# EAGLE board tigerV3s (EAGLE 9.6.2)
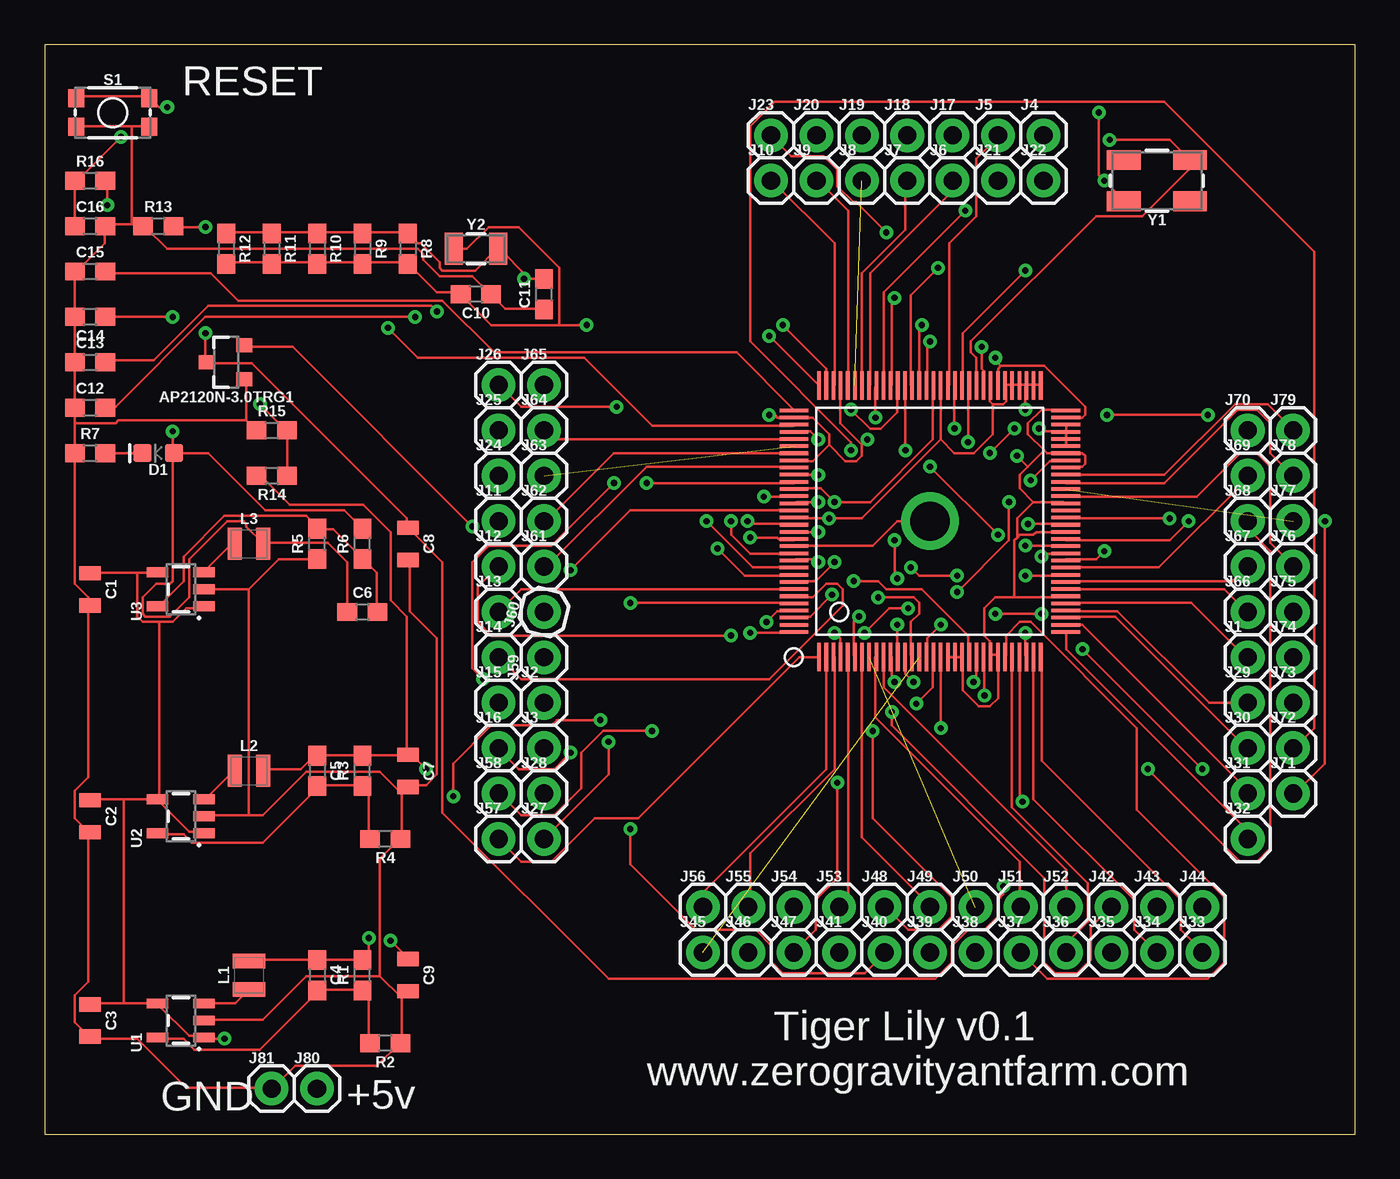
[diagram p0: board, top side]
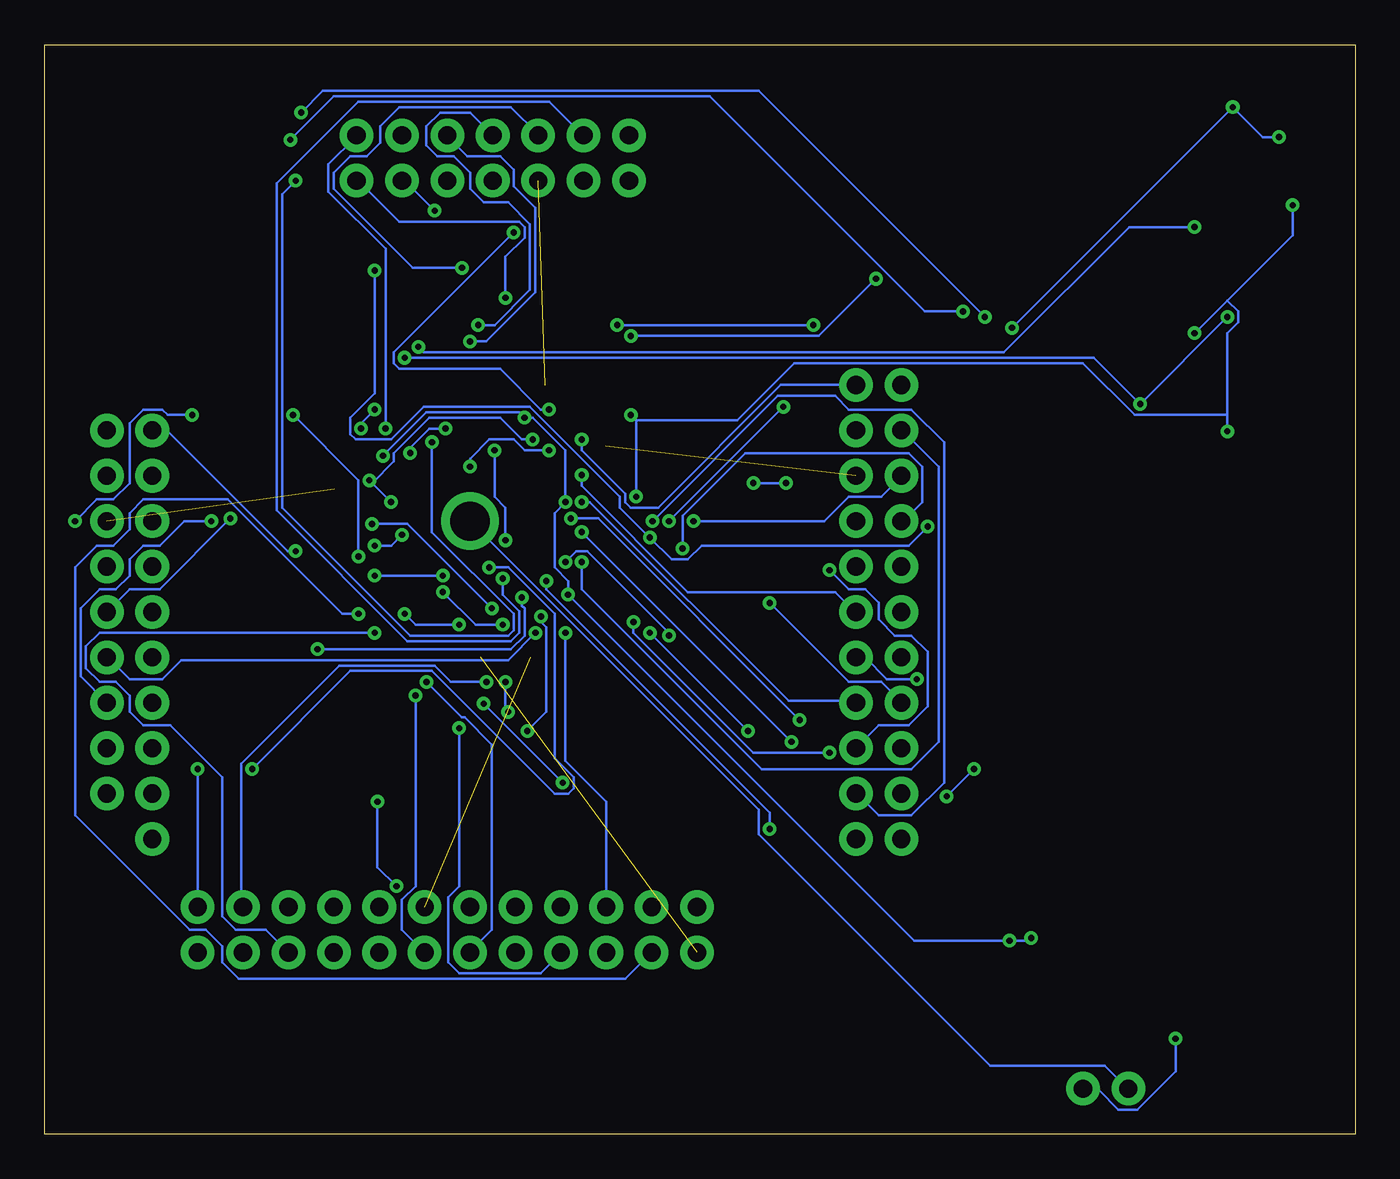
[diagram p1: board, bottom side, seen from below]

Size 73.33 x 60.95 mm. Coordinates in mm from the lower left corner, seen from the top.
Outline: 0,0 73.33,0 73.33,60.95 0,60.95 0,0
Copper layers (1*16): Top 0.035mm / dielectric 1.5mm / Bottom 0.035mm
Design rules "default": minimum track width 6mil, minimum drill 0.35mm, track to track 6mil, track to pad 6mil, pad to pad 6mil, via to via 6mil, smd to smd 6mil, copper to edge 40mil, drill to drill 6mil, minimum pad ring 10mil, minimum via ring 8mil, stop-mask expansion 4mil, vias tented up to drill 0mil, thermal gap 10mil

## Footprints (pad centres in the part's own frame; a part is rotated, then mirrored left to right if it is on the bottom)
SOT23-3 = smd 0.8 x 0.9: 1 -0.95,-1; 2 0.95,-1; 3 0,1.1
0805 = smd 0.8 x 1.2: 1 -0.9,0; 2 0.9,0
0603 = smd 1.1 x 1: 1 -0.85,0; 2 0.85,0
LED-0603 = smd 1 x 1: A -0.877,0; C 0.877,0
1X01 = drill 1.016 pad 1.88: 1 0,0
0805-WIDE = smd 0.8 x 1.8: 1 -0.8,0; 2 0.8,0
TACTILE_SWITCH_SMD_4.6X2.8MM = smd 0.9 x 1: 1 -2.05,-0.8; 2 2.05,-0.8; 3 2.05,0.8; 4 -2.05,0.8
SOT23-5 = smd 0.55 x 1.2: 1 -0.95,-1.3; 2 0,-1.3; 3 0.95,-1.3; 4 0.95,1.3; 5 -0.95,1.3
QFP-128 = smd 0.2 x 1.6: 1 -6.2,-7.6; 2 -5.8,-7.6; 3 -5.4,-7.6; 4 -5,-7.6; 5 -4.6,-7.6; 6 -4.2,-7.6; 7 -3.8,-7.6; 8 -3.4,-7.6; 9 -3,-7.6; 10 -2.6,-7.6; 11 -2.2,-7.6; 12 -1.8,-7.6; 13 -1.4,-7.6; 14 -1,-7.6; 15 -0.6,-7.6; 16 -0.2,-7.6; 17 0.2,-7.6; 18 0.6,-7.6; 19 1,-7.6; 20 1.4,-7.6; 21 1.8,-7.6; 22 2.2,-7.6; 23 2.6,-7.6; 24 3,-7.6; 25 3.4,-7.6; 26 3.8,-7.6; 27 4.2,-7.6; 28 4.6,-7.6; 29 5,-7.6; 30 5.4,-7.6; 31 5.8,-7.6; 32 6.2,-7.6; 65 6.2,7.6; 66 5.8,7.6; 67 5.4,7.6; 68 5,7.6; 69 4.6,7.6; 70 4.2,7.6; 71 3.8,7.6; 72 3.4,7.6; 73 3,7.6; 74 2.6,7.6; 75 2.2,7.6; 76 1.8,7.6; 77 1.4,7.6; 78 1,7.6; 79 0.6,7.6; 80 0.2,7.6; 81 -0.2,7.6; 82 -0.6,7.6; 83 -1,7.6; 84 -1.4,7.6; 85 -1.8,7.6; 86 -2.2,7.6; 87 -2.6,7.6; 88 -3,7.6; 89 -3.4,7.6; 90 -3.8,7.6; 91 -4.2,7.6; 92 -4.6,7.6; 93 -5,7.6; 94 -5.4,7.6; 95 -5.8,7.6; 96 -6.2,7.6 | smd 1.6 x 0.2: 33 7.6,-6.2; 34 7.6,-5.8; 35 7.6,-5.4; 36 7.6,-5; 37 7.6,-4.6; 38 7.6,-4.2; 39 7.6,-3.8; 40 7.6,-3.4; 41 7.6,-3; 42 7.6,-2.6; 43 7.6,-2.2; 44 7.6,-1.8; 45 7.6,-1.4; 46 7.6,-1; 47 7.6,-0.6; 48 7.6,-0.2; 49 7.6,0.2; 50 7.6,0.6; 51 7.6,1; 52 7.6,1.4; 53 7.6,1.8; 54 7.6,2.2; 55 7.6,2.6; 56 7.6,3; 57 7.6,3.4; 58 7.6,3.8; 59 7.6,4.2; 60 7.6,4.6; 61 7.6,5; 62 7.6,5.4; 63 7.6,5.8; 64 7.6,6.2; 97 -7.6,6.2; 98 -7.6,5.8; 99 -7.6,5.4; 100 -7.6,5; 101 -7.6,4.6; 102 -7.6,4.2; 103 -7.6,3.8; 104 -7.6,3.4; 105 -7.6,3; 106 -7.6,2.6; 107 -7.6,2.2; 108 -7.6,1.8; 109 -7.6,1.4; 110 -7.6,1; 111 -7.6,0.6; 112 -7.6,0.2; 113 -7.6,-0.2; 114 -7.6,-0.6; 115 -7.6,-1; 116 -7.6,-1.4; 117 -7.6,-1.8; 118 -7.6,-2.2; 119 -7.6,-2.6; 120 -7.6,-3; 121 -7.6,-3.4; 122 -7.6,-3.8; 123 -7.6,-4.2; 124 -7.6,-4.6; 125 -7.6,-5; 126 -7.6,-5.4; 127 -7.6,-5.8; 128 -7.6,-6.2 | drill 2.2: P$2 0,0
CRYSTAL-SMD-5X3.2-4PAD = smd 1.9 x 1.1: 1 -1.85,-1.15; 2 1.85,-1.15; 3 1.85,1.15; 4 -1.85,1.15
CRYSTAL-SMD-3.2X1.5MM = smd 1 x 1.8: P$1 -1.25,0; P$2 1.25,0

## Placement (x,y rotation side)
AP2120N-3.0TRG1  20V/4.2A/52mΩ/1.4W  [SOT23-3]  10.16,43.18 90 top
C1  22uF  [0805]  2.54,30.48 270 top
C2  22uF  [0805]  2.54,17.78 270 top
C3  22uF  [0805]  2.54,6.35 270 top
C4  22pF  [0603]  15.24,8.89 270 top
C5  22pF  [0603]  15.24,20.32 270 top
C6  22pF  [0603]  17.78,29.21 0 top
C7  22uF  [0805]  20.32,20.32 270 top
C8  22uF  [0805]  20.32,33.02 270 top
C9  22uF  [0805]  20.32,8.89 270 top
C10  18pF  [0603]  24.13,46.99 180 top
C11  18pF  [0603]  27.94,46.99 90 top
C12  18pF  [0603]  2.54,40.64 0 top
C13  18pF  [0603]  2.54,43.18 0 top
C14  1nF  [0603]  2.54,45.72 180 top
C15  4.7uF  [0603]  2.54,48.26 0 top
C16  1.0uF  [0603]  2.54,50.8 0 top
D1  BLUE  [LED-0603]  6.35,38.1 180 top
J1  [1X01]  67.31,26.67 0 top
J2  [1X01]  27.94,24.13 0 top
J3  [1X01]  27.94,21.59 0 top
J4  [1X01]  55.88,55.88 0 top
J5  [1X01]  53.34,55.88 0 top
J6  [1X01]  50.8,53.34 0 top
J7  [1X01]  48.26,53.34 0 top
J8  [1X01]  45.72,53.34 0 top
J9  [1X01]  43.18,53.34 0 top
J10  [1X01]  40.64,53.34 0 top
J11  [1X01]  25.4,34.29 0 top
J12  [1X01]  25.4,31.75 0 top
J13  [1X01]  25.4,29.21 0 top
J14  [1X01]  25.4,26.67 0 top
J15  [1X01]  25.4,24.13 0 top
J16  [1X01]  25.4,21.59 0 top
J17  [1X01]  50.8,55.88 0 top
J18  [1X01]  48.26,55.88 0 top
J19  [1X01]  45.72,55.88 0 top
J20  [1X01]  43.18,55.88 0 top
J21  [1X01]  53.34,53.34 0 top
J22  [1X01]  55.88,53.34 0 top
J23  [1X01]  40.64,55.88 0 top
J24  [1X01]  25.4,36.83 0 top
J25  [1X01]  25.4,39.37 0 top
J26  [1X01]  25.4,41.91 0 top
J27  [1X01]  27.94,16.51 0 top
J28  [1X01]  27.94,19.05 0 top
J29  [1X01]  67.31,24.13 0 top
J30  [1X01]  67.31,21.59 0 top
J31  [1X01]  67.31,19.05 0 top
J32  [1X01]  67.31,16.51 0 top
J33  [1X01]  64.77,10.16 0 top
J34  [1X01]  62.23,10.16 0 top
J35  [1X01]  59.69,10.16 0 top
J36  [1X01]  57.15,10.16 0 top
J37  [1X01]  54.61,10.16 0 top
J38  [1X01]  52.07,10.16 0 top
J39  [1X01]  49.53,10.16 0 top
J40  [1X01]  46.99,10.16 0 top
J41  [1X01]  44.45,10.16 0 top
J42  [1X01]  59.69,12.7 0 top
J43  [1X01]  62.23,12.7 0 top
J44  [1X01]  64.77,12.7 0 top
J45  [1X01]  36.83,10.16 0 top
J46  [1X01]  39.37,10.16 0 top
J47  [1X01]  41.91,10.16 0 top
J48  [1X01]  46.99,12.7 0 top
J49  [1X01]  49.53,12.7 0 top
J50  [1X01]  52.07,12.7 0 top
J51  [1X01]  54.61,12.7 0 top
J52  [1X01]  57.15,12.7 0 top
J53  [1X01]  44.45,12.7 0 top
J54  [1X01]  41.91,12.7 0 top
J55  [1X01]  39.37,12.7 0 top
J56  [1X01]  36.83,12.7 0 top
J57  [1X01]  25.4,16.51 0 top
J58  [1X01]  25.4,19.05 0 top
J59  [1X01]  27.94,26.67 90 top
J60  [1X01]  27.94,29.21 75.9 top
J61  [1X01]  27.94,31.75 0 top
J62  [1X01]  27.94,34.29 0 top
J63  [1X01]  27.94,36.83 0 top
J64  [1X01]  27.94,39.37 0 top
J65  [1X01]  27.94,41.91 0 top
J66  [1X01]  67.31,29.21 0 top
J67  [1X01]  67.31,31.75 0 top
J68  [1X01]  67.31,34.29 0 top
J69  [1X01]  67.31,36.83 0 top
J70  [1X01]  67.31,39.37 0 top
J71  [1X01]  69.85,19.05 0 top
J72  [1X01]  69.85,21.59 0 top
J73  [1X01]  69.85,24.13 0 top
J74  [1X01]  69.85,26.67 0 top
J75  [1X01]  69.85,29.21 0 top
J76  [1X01]  69.85,31.75 0 top
J77  [1X01]  69.85,34.29 0 top
J78  [1X01]  69.85,36.83 0 top
J79  [1X01]  69.85,39.37 0 top
J80  [1X01]  15.24,2.54 0 top
J81  [1X01]  12.7,2.54 0 top
L1  2.2μH  [0805-WIDE]  11.43,8.89 90 top
L2  2.2μH  [0805-WIDE]  11.43,20.32 0 top
L3  2.2μH  [0805-WIDE]  11.43,33.02 0 top
R1  300k  [0603]  17.78,8.89 90 top
R2  300k  [0603]  19.05,5.08 180 top
R3  300k  [0603]  17.78,20.32 90 top
R4  150k  [0603]  19.05,16.51 180 top
R5  180  [0603]  15.24,33.02 90 top
R6  820k  [0603]  17.78,33.02 90 top
R7  10  [0603]  2.54,38.1 0 top
R8  2.0M  [0603]  20.32,49.53 270 top
R9  2.0M  [0603]  17.78,49.53 270 top
R10  2.0M  [0603]  15.24,49.53 270 top
R11  2.0M  [0603]  12.7,49.53 270 top
R12  2.0M  [0603]  10.16,49.53 270 top
R13  240  [0603]  6.35,50.8 0 top
R14  2.0k  [0603]  12.7,36.83 180 top
R15  2.0k  [0603]  12.7,39.37 0 top
R16  47k  [0603]  2.54,53.34 0 top
S1  MOMENTARY-SWITCH-SPST-SMD-4.6X2.8MM  [TACTILE_SWITCH_SMD_4.6X2.8MM]  3.81,57.15 0 top
U1  [SOT23-5]  7.62,6.35 90 top
U2  [SOT23-5]  7.62,17.78 90 top
U3  [SOT23-5]  7.62,30.48 90 top
U$1  V3S  [QFP-128]  49.53,34.29 0 top
Y1  24MHz  [CRYSTAL-SMD-5X3.2-4PAD]  62.23,53.34 180 top
Y2  32.768kHz  [CRYSTAL-SMD-3.2X1.5MM]  24.13,49.53 0 top

## Library data of the parts
AP2120N-3.0TRG1 = SparkFun-DiscreteSemi; PROD_ID: TRAN-14388
C1-C3 C7-C9 = SparkFun-Capacitors; PROD_ID: CAP-08402
C4-C6 = SparkFun-Capacitors; PROD_ID: CAP-07876
C10-C13 = SparkFun-Capacitors; PROD_ID: CAP-08267
C14 = SparkFun-Capacitors; PROD_ID: CAP-07886
C15 = SparkFun-Capacitors; PROD_ID: CAP-08280
C16 = SparkFun-Capacitors; PROD_ID: CAP-00868
D1 = SparkFun-LED; PROD_ID: DIO-08575
J1-J81 = SparkFun-Connectors
L1-L3 = SparkFun-Coils; PROD_ID: NDUC-14234
R1-R3 = SparkFun-Resistors; PROD_ID: RES-10809
R4 = SparkFun-Resistors; PROD_ID: RES-09117
R5 = SparkFun-Resistors; PROD_ID: RES-08788
R6 = SparkFun-Resistors; PROD_ID: RES-13247
R7 = SparkFun-Resistors; PROD_ID: RES-12581
R8-R12 = SparkFun-Resistors; PROD_ID: RES-10054
R13 = SparkFun-Resistors; PROD_ID: RES-07849
R14 R15 = SparkFun-Resistors; PROD_ID: RES-08296
R16 = SparkFun-Resistors; PROD_ID: RES-07871
S1 = SparkFun-Switches; PROD_ID: SWCH-13065
U1-U3 = SparkFun-IC-Power; PROD_ID: IC-14465
U$1 = allwinnerV3s
Y1 = SparkFun-Clocks; PROD_ID: XTAL-08298; SF_ID: COM-08581
Y2 = SparkFun-Clocks; PROD_ID: XTAL-13062

## Nets
+1.2V: C4.1 C9.1 L1.2 R1.2 U$1.19 U$1.20 U$1.21 U$1.25 U$1.26 U$1.38 U$1.47 U$1.51 U$1.56 U$1.58 U$1.64 U$1.80 U$1.88 U$1.108 U$1.126
+1.8V: C5.1 C7.1 L2.2 R3.2 R14.2 U$1.59 U$1.60 U$1.61 U$1.62 U$1.65 U$1.66 U$1.67 U$1.68 U$1.69 U$1.70 U$1.72 U$1.79 U$1.112
+3.0V: AP2120N-3.0TRG1.2 U$1.76 U$1.115
+3.3V: AP2120N-3.0TRG1.3 C6.1 C8.1 D1.A L3.2 R6.2 R16.2 U$1.12 U$1.29 U$1.57 U$1.93 U$1.98 U$1.104 U$1.109
+5V: C1.1 C2.1 C3.1 J80.1 U1.1 U1.4 U2.1 U2.4 U3.1 U3.4
GND: AP2120N-3.0TRG1.1 C1.2 C2.2 C3.2 C7.2 C8.2 C9.2 C10.1 C11.1 C12.1 C13.1 C14.2 C15.1 C16.2 J81.1 R2.1 R4.1 R5.1 R7.1 R13.1 R15.1 S1.1 S1.2 U1.2 U2.2 U3.2 U$1.116 U$1.P$2
N$1: L1.1 U1.3
N$2: D1.C R7.2
N$3: L2.1 U2.3
N$4: C13.2 U$1.74 Y1.1
N$5: L3.1 U3.3
N$6: C12.2 U$1.75 Y1.3
N$7: C6.2 R5.2 R6.1 U3.5
N$8: C5.2 R3.1 R4.2 U2.5
N$9: C4.2 R1.1 R2.2 U1.5
N$10: C10.2 R8.2 R9.2 R10.2 R11.2 R12.2 U$1.95 Y2.P$1
N$11: C11.2 R8.1 R9.1 R10.1 R11.1 R12.1 U$1.96 Y2.P$2
RESET: C16.1 R16.1 S1.3 S1.4 U$1.99
SVREF: C14.1 R14.1 R15.2 U$1.63 U$1.71
U$1_EPHY_LINK_LED: J4.1 U$1.77
U$1_EPHY_RTX: J10.1 U$1.94
U$1_EPHY_RXN: J6.1 U$1.89
U$1_EPHY_RXP: J7.1 U$1.90
U$1_EPHY_SPD_LED: J5.1 U$1.78
U$1_EPHY_TXN: J8.1 U$1.91
U$1_EPHY_TXP: J9.1 U$1.92
U$1_HBIAS: J24.1 U$1.119
U$1_HPCOM: J16.1 U$1.125
U$1_HPCOMFB: J15.1 U$1.124
U$1_HPOUTL: J12.1 U$1.121
U$1_HPOUTR: J11.1 U$1.120
U$1_HPVCCBP: J14.1 U$1.123
U$1_HPVCCIN: J13.1 U$1.122
U$1_MCSI-CKN: J21.1 U$1.87
U$1_MCSI-CKP: J22.1 U$1.86
U$1_MCSI-D0N: J18.1 U$1.82
U$1_MCSI-D0P: J17.1 U$1.81
U$1_MCSI-D1N: J20.1 U$1.84
U$1_MCSI-D1P: J19.1 U$1.83
U$1_MICIN1N: J27.1 U$1.114
U$1_MICIN1P: J28.1 U$1.113
U$1_PB0/UART2/TX: J66.1 U$1.39
U$1_PB1/UART2/RX: J67.1 U$1.40
U$1_PB2: J68.1 U$1.41
U$1_PB3: J69.1 U$1.42
U$1_PB4/PWM0: J70.1 U$1.43
U$1_PB5/PWM1: J71.1 U$1.44
U$1_PB6/I2C0/SCL: J72.1 U$1.45
U$1_PB7/I2C0/SDA: J73.1 U$1.46
U$1_PB8/I2C1/SCL: J74.1 U$1.48
U$1_PB9/I2C1/SDA: J75.1 U$1.49
U$1_PC0/SPI1/MISO: J76.1 U$1.52
U$1_PC1/SPI1/SCK: J77.1 U$1.53
U$1_PC2/SPI1/CS: J78.1 U$1.54
U$1_PC3/SPI1/MOSI: J79.1 U$1.55
U$1_PE0/CSI-CLK-/LCD-CLK: J1.1 U$1.37
U$1_PE1/CSI-MCLK/LCD-DE: J29.1 U$1.36
U$1_PE2/CSI-HSYNC/LCD-HSYNC: J30.1 U$1.35
U$1_PE3/CSI-VSYNC/LCD-VSYNC: J31.1 U$1.34
U$1_PE4/CSI-D0/LCD-D2: J32.1 U$1.33
U$1_PE5/CSI-D1/-LCD-D3: J33.1 U$1.32
U$1_PE6/CSI-D2/LCD-D4: J34.1 U$1.31
U$1_PE7/CSI-D3/LCD-D5: J35.1 U$1.30
U$1_PE8/CSI-D4/LCD-D6: J36.1 U$1.28
U$1_PE9/CSI-D5/LCD-D7: J37.1 U$1.27
U$1_PE10/CSI-D6/LCD-D10: J38.1 U$1.24
U$1_PE11/CSI-D7/LCD-D11: J39.1 U$1.23
U$1_PE12/CSI-D8/LCD-D12: J40.1 U$1.22
U$1_PE13/CSI-D9/LCD-D13: J41.1 U$1.18
U$1_PE14/CSI-D10/LCD-D14: J47.1 U$1.17
U$1_PE15/CSI-D11/LCD-D15: J46.1 U$1.16
U$1_PE16/CSI-D12/LCD-D18: J45.1 U$1.15
U$1_PE17/CSI-D13/LCD-D19: J44.1 U$1.14
U$1_PE18/CSI-D14/LCD-D20: J43.1 U$1.13
U$1_PE19/CSI-D15/LCD-D21: J42.1 U$1.11
U$1_PE20/CSI-FIELD/CSI-MIPI-M-CLK: J52.1 U$1.10
U$1_PE21/UART1/TX: J51.1 U$1.9
U$1_PE22/UART1/RX: J50.1 U$1.8
U$1_PE23/LCD-D22/: J49.1 U$1.7
U$1_PE24/LCD-D23: J48.1 U$1.6
U$1_PF0/SDC0/D1: J59.1 U$1.107
U$1_PF1/SDC0/D0: J60.1 U$1.106
U$1_PF2/SDC0/CLK: J61.1 U$1.105
U$1_PF3/SDC0/CMD: J62.1 U$1.103
U$1_PF4/SDC0/D3: J63.1 U$1.102
U$1_PF5/SDC0/D2: J64.1 U$1.101
U$1_PF6: J65.1 U$1.100
U$1_PG0/SDC1/CLK: J53.1 U$1.5
U$1_PG1/SDC1/CMD: J54.1 U$1.4
U$1_PG2/SDC1/D0: J55.1 U$1.3
U$1_PG3/SDC1/D1: J56.1 U$1.2
U$1_PG4/SDC1/D2: J57.1 U$1.1
U$1_PG5/SDC1/D3: J58.1 U$1.128
U$1_RTC-VIO: C15.2 U$1.97
U$1_SZQ: R13.2 U$1.73
U$1_USB-DM: J2.1 U$1.110
U$1_USB-DP: J3.1 U$1.111
U$1_VCC-1: U$1.127
U$1_VCC-3: U$1.50
U$1_VCC-MCSI: J23.1 U$1.85
U$1_VRA1: J26.1 U$1.117
U$1_VRA2: J25.1 U$1.118

## Tracks (layer width: path | path; a pad name or v marks a point on that pad's centre or on a via)
+1.2V  (via drill 0.35)
  Top 0.152: U$1.56 57.15,37.34 58.06,37.34 58.22,37.49 58.22,37.95 58.06,38.1 57.15,38.1 U$1.58 57,38.1 56.08,38.1 55.93,38.25 | 55.93,38.25 55.02,39.17 55.02,39.78 55.78,40.54 57,40.54 U$1.64 | 50.9,26.67 50.6,26.67 U$1.19 | 50.9,26.67 51.36,26.67 | 50.9,26.67 U$1.20 | 52.88,26.82 53.34,26.82 U$1.26 53.34,26.67 53.34,24.38 52.88,23.93 52.27,23.93 51.36,24.84 51.36,26.67 | 54.25,30.02 53.19,30.02 52.58,29.41 52.58,27.89 52.88,27.58 52.88,26.82 | 54.25,30.02 57,30.02 U$1.38 | 52.88,26.82 U$1.25 | 54.41,33.38 54.25,33.22 54.25,30.02 | 54.41,33.38 54.56,33.53 55.32,33.53 55.47,33.68 57,33.68 U$1.47 | 55.32,35.36 57,35.36 U$1.51 | 55.32,35.36 54.41,34.44 54.41,33.38 | 51.36,26.67 U$1.21 | 55.02,37.34 54.56,36.88 54.56,36.12 55.32,35.36 | 55.02,37.34 55.93,38.25 | 15.24,9.75 17.68,9.75 R1.2 17.83,9.75 18.14,10.06 v18.14,10.97 | v19.36,10.82 20.27,9.91 C9.1 | 15.24,9.75 11.43,9.75 L1.2 | 15.24,9.75 C4.1 | v44.04,30.18 42.82,28.96 42.06,28.96 U$1.126 | U$1.108 42.06,36.12 43.43,36.12 v44.2,35.36 46.18,35.36 49.68,38.86 49.68,41.76 U$1.80 | v46.48,40.08 46.48,41.76 U$1.88 | v54.41,37.95 55.02,37.34
  Bottom 0.152: v18.14,10.97 18.29,10.82 v19.36,10.82 24.69,10.82 v44.04,30.18 44.04,30.94 44.81,31.7 44.81,34.75 v44.2,35.36 44.2,38.25 46.02,40.08 v46.48,40.08 46.79,40.39 51.97,40.39 v54.41,37.95
+1.8V  (via drill 0.35)
  Top 0.152: 57.15,38.86 57.15,38.56 U$1.59 | 57.15,39.32 57.15,39.62 U$1.62 | 57.15,39.32 57.15,38.86 | 57.15,38.86 U$1.60 | 57.15,39.32 U$1.61 57,39.32 55.78,39.32 v55.63,39.47 | 53.03,40.84 52.88,41 52.88,41.76 U$1.72 | 53.03,40.84 53.65,40.84 53.8,41 53.8,41.76 U$1.70 53.8,41.91 54.1,41.91 | 54.56,41.91 54.86,41.91 U$1.67 | 55.32,41.91 55.02,41.91 U$1.67 | 55.32,41.91 55.78,41.91 U$1.65 | 55.32,41.91 U$1.66 | 54.56,41.91 54.1,41.91 | 54.1,41.91 U$1.69 | 54.56,41.91 U$1.68 | v54.86,40.54 54.86,41.76 U$1.67 | 50.14,38.86 45.72,34.44 v43.89,34.44 42.06,34.44 U$1.112 | 50.14,38.86 50.14,41.76 U$1.79 | 53.03,40.84 53.03,39.17 51.97,38.1 50.9,38.1 50.14,38.86 | L2.2 12.34,20.42 14.33,20.42 14.94,21.03 15.24,21.03 C5.1 15.24,21.18 17.68,21.18 R3.2 17.83,21.18 20.27,21.18 C7.1 | R14.2 11.89,36.73 12.19,36.73 13.72,35.2 17.83,35.2 19.36,33.68 19.36,29.87 20.27,28.96 20.27,21.34 C7.1 | v31.09,23.16 28.65,23.16 28.35,22.86 24.99,22.86 22.86,20.73 v22.86,18.9 | v21.34,20.42 20.42,21.34 C7.1
  Bottom 0.152: v55.63,39.47 55.63,39.78 v54.86,40.54 | v43.89,34.44 42.37,34.44 v31.09,23.16 | v21.34,20.42 v22.86,18.9
+3.0V  (via drill 0.35)
  Top 0.152: v23.93,33.98 13.87,44.04 11.28,44.04 AP2120N-3.0TRG1.2 | v39.47,33.38 41,33.38 41.15,33.22 41.91,33.22 U$1.115 | v54.86,48.31 51.36,44.81 51.36,41.91 U$1.76
  Bottom 0.152: v23.93,33.98 24.99,32.92 36.58,32.92 37.34,32.16 38.25,32.16 v39.47,33.38 41.15,35.05 41.15,35.66 46.18,40.69 52.12,40.69 53.95,38.86 55.93,38.86 56.24,39.17 56.24,40.08 54.86,41.45 v54.86,48.31
+3.3V  (via drill 0.35)
  Top 0.152: v40.23,35.66 41.91,35.66 U$1.109 | v40.54,40.23 40.84,40.23 41,40.08 41.91,40.08 U$1.98 42.06,40.08 42.98,40.08 43.89,39.17 43.89,38.56 | 43.89,38.56 42.98,37.64 42.06,37.64 U$1.104 | 45.72,38.56 44.5,39.78 44.5,41.76 U$1.93 | 45.72,38.56 45.72,37.95 45.41,37.64 44.81,37.64 43.89,38.56 | v47.7,28.5 47.7,26.82 U$1.12 | v51.05,30.33 53.95,33.22 v53.95,35.36 | v55.17,36.58 56.24,37.64 57,37.64 U$1.57 | v46.02,38.86 45.72,38.56 | C6.1 16.92,29.26 16.92,32 15.85,33.07 12.34,33.07 L3.2 12.19,33.07 11.28,33.98 11.28,34.14 11.12,34.29 10.21,34.29 8.08,32.16 8.08,30.02 7.01,28.96 5.64,28.96 5.49,29.11 5.49,30.02 6.25,30.79 7.01,30.79 7.16,30.94 7.16,38.1 | R6.2 17.68,33.98 16.76,34.9 12.34,34.9 9.14,38.1 D1.A 7.16,38.1 | v3.5,51.97 3.5,53.34 R16.2 | v8.99,44.81 8.99,43.28 AP2120N-3.0TRG1.3 9.14,43.13 11.58,43.13 20.27,34.44 20.27,33.98 C8.1 20.42,33.83 22.25,32 22.25,17.98 31.55,8.69 49.84,8.69 50.75,9.6 50.75,10.52 51.66,11.43 52.58,11.43 53.34,12.19 53.34,13.11 53.65,13.41 v53.65,13.87 | v54.71,18.59 54.56,18.75 54.56,26.67 U$1.29 | v7.16,39.32 7.16,38.1
  Bottom 0.152: 40.23,39.93 v40.23,35.66 | v40.54,40.23 40.23,39.93 | v47.7,28.5 49.23,28.5 v51.05,30.33 | 55.02,36.42 v53.95,35.36 | v46.02,38.86 46.63,38.86 47.85,40.08 51.82,40.08 53.8,38.1 53.8,37.64 55.02,36.42 | 55.02,36.42 v55.17,36.58 | v3.5,51.97 3.5,50.29 7.16,46.63 | v8.99,44.81 7.16,46.63 | v54.71,18.59 54.71,14.94 v53.65,13.87 | 7.16,40.23 7.16,44.81 6.55,45.41 6.55,46.02 7.16,46.63 | 7.16,40.23 v7.16,39.32 | 40.23,39.93 34.59,39.93 31.39,43.13 15.24,43.13 12.34,40.23 7.16,40.23
+5V  (via drill 0.35)
  Top 0.152: 4.42,18.75 6.25,18.75 U2.4 | 4.42,18.75 2.59,18.75 C2.1 | U2.1 8.84,16.92 8.08,16.92 6.4,18.59 U2.4 | 5.18,31.39 6.25,31.39 U3.4 | 5.18,31.39 2.59,31.39 C1.1 | 6.4,28.65 5.49,28.65 5.18,28.96 5.18,31.39 | 6.4,28.65 7.16,28.65 7.92,29.41 8.84,29.41 U3.1 | 6.4,28.65 6.4,18.75 U2.4 | 4.42,7.32 6.25,7.32 U1.4 6.4,7.16 8.08,5.49 8.84,5.49 U1.1 8.99,5.33 v10.06,5.33 | 4.42,7.32 2.59,7.32 C3.1 | 4.42,7.32 4.42,18.75
  Bottom 0.152: v10.06,5.33 10.06,3.5 12.19,1.37 13.26,1.37 14.33,2.44 15.24,2.44 J80.1
GND
  Top 0.152: 11.28,39.93 11.28,42.22 AP2120N-3.0TRG1.1 | 11.28,39.93 11.73,39.47 R15.1 | 1.68,39.78 1.68,40.54 C12.1 1.68,40.69 1.68,43.13 C13.1 1.68,43.28 1.68,45.72 | 1.68,39.78 1.68,38.1 | 1.68,38.1 1.68,30.79 2.44,30.02 2.44,29.72 C1.2 2.44,29.57 2.44,19.96 1.68,19.2 1.68,17.68 2.44,16.92 C2.2 2.44,16.76 2.44,8.53 1.68,7.77 1.68,6.25 2.44,5.49 C3.2 2.59,5.33 5.18,5.33 7.92,2.59 12.65,2.59 J81.1 12.8,2.59 14.02,3.81 18.59,3.81 19.81,5.03 R2.1 19.96,5.18 19.96,7.62 | 1.68,38.1 R7.1 | 11.28,39.93 4.12,39.93 3.96,39.78 1.68,39.78 | C11.1 27.89,46.18 25.76,46.18 24.99,46.94 C10.1 24.84,47.09 23.93,48.01 22.1,48.01 21.18,48.92 21.18,49.23 20.88,49.53 6.86,49.53 5.64,50.75 R13.1 5.49,50.9 4.88,50.9 | 4.88,56.39 5.79,56.39 S1.2 | 4.88,56.39 1.83,56.39 S1.1 | 4.88,50.9 3.5,50.9 C16.2 3.35,50.75 3.35,49.84 1.83,48.31 C15.1 1.68,48.16 1.68,45.72 | 1.68,45.72 C14.2 | 4.88,50.9 4.88,56.39 | 19.96,7.62 20.27,7.92 C9.2 19.96,7.62 | 18.75,8.84 14.63,8.84 12.19,6.4 8.99,6.4 U1.2 | 19.96,7.62 18.75,8.84 | 11.43,30.48 13.11,32.16 15.24,32.16 R5.1 | U3.2 11.43,30.48 | 19.96,19.05 19.96,16.61 R4.1 19.81,16.46 18.75,15.39 18.75,8.84 | 19.96,19.05 20.27,19.36 C7.2 | 11.43,17.83 12.19,17.83 14.63,20.27 18.75,20.27 19.96,19.05 | 11.43,17.83 8.99,17.83 U2.2 | 19.96,19.05 C7.2 | C8.2 20.42,32 20.42,29.26 21.95,27.74 21.95,20.12 21.34,19.51 20.42,19.51 C7.2 | 11.43,17.83 11.43,30.48 | U$1.P$2 47.7,34.29 46.33,32.92 42.06,32.92 U$1.116
  Bottom 0.152: U$1.P$2 33.38,18.14 33.38,16.76 20.42,3.81 14.02,3.81 12.8,2.59 J81.1
N$1
  Top 0.152: U1.3 8.99,7.32 10.67,7.32 11.43,8.08 L1.1
N$2
  Top 0.152: R7.2 D1.C
N$3
  Top 0.152: U2.3 8.99,18.75 10.52,20.27 L2.1
N$4  (via drill 0.35)
  Top 0.152: v21.95,46.02 21.64,46.33 9.14,46.33 6.1,43.28 3.5,43.28 C13.2 | v59.59,55.63 62.94,55.63 64.01,54.56 Y1.1 64.01,54.41 64.01,53.95 61.42,51.36 58.83,51.36 51.82,44.35 51.82,43.74 52.12,43.43 52.12,41.91 U$1.74
  Bottom 0.152: v21.95,46.02 24.08,46.02 36.12,58.06 57.15,58.06 v59.59,55.63
N$5
  Top 0.152: U3.3 8.99,31.55 10.52,33.07 L3.1
N$6  (via drill 0.35)
  Top 0.152: v20.73,45.72 8.99,45.72 3.96,40.69 3.5,40.69 C12.2 | v58.98,57.15 58.98,53.65 v59.28,53.34 60.35,52.27 Y1.3 | v51.66,38.71 51.66,41.76 U$1.75
  Bottom 0.152: v20.73,45.72 33.38,58.37 57.76,58.37 v58.98,57.15 | v51.66,38.71 51.66,33.68 47.09,29.11 47.09,28.19 47.4,27.89 52.88,27.89 60.05,35.05 60.05,52.58 v59.28,53.34
N$7
  Top 0.152: C6.2 18.59,29.26 18.59,31.39 17.83,32.16 R6.1 17.68,32.31 16.15,33.83 15.24,33.83 R5.2 15.24,33.98 14.63,34.59 10.06,34.59 7.77,32.31 7.77,30.94 6.4,29.57 U3.5
N$8
  Top 0.152: R4.2 18.14,16.61 18.14,19.05 17.83,19.36 R3.1 17.68,19.51 15.24,19.51 C5.2 15.24,19.36 12.19,16.31 8.23,16.31 7.77,16.76 6.4,16.76 U2.5
N$9
  Top 0.152: R2.2 18.14,5.18 18.14,7.62 17.83,7.92 R1.1 17.68,8.08 15.24,8.08 C4.2 15.24,7.92 12.04,4.72 8.38,4.72 7.77,5.33 6.4,5.33 U1.5
N$10  (via drill 0.35)
  Top 0.152: R12.2 10.21,48.77 12.65,48.77 R11.2 12.8,48.77 15.24,48.77 | v41.3,45.26 43.74,42.82 43.74,41.91 U$1.95 | 28.8,45.26 24.99,45.26 23.32,46.94 C10.2 23.16,47.09 21.95,47.09 20.42,48.62 R8.2 20.27,48.77 17.83,48.77 R9.2 17.68,48.77 15.24,48.77 | 28.8,45.26 v30.33,45.26 | Y2.P$1 23.62,49.53 24.84,50.75 26.52,50.75 28.8,48.46 28.8,45.26 | 15.24,48.77 R10.2
  Bottom 0.152: v30.33,45.26 v41.3,45.26
N$11  (via drill 0.35)
  Top 0.152: R12.1 10.21,50.44 12.65,50.44 R11.1 12.8,50.44 15.24,50.44 | 15.24,50.44 17.68,50.44 R9.1 17.83,50.44 20.27,50.44 R8.1 20.42,50.29 20.88,49.84 21.03,49.84 22.1,48.77 22.1,48.46 22.25,48.31 24.08,48.31 25.3,49.53 Y2.P$2 25.45,49.53 26.98,48.01 | 15.24,50.44 R10.1 | 26.98,48.01 27.13,47.85 27.89,47.85 C11.2 | v40.54,44.65 43.28,41.91 U$1.96 | 26.98,48.01 v26.82,47.85
  Bottom 0.152: v40.54,44.65 30.02,44.65 v26.82,47.85
RESET  (via drill 0.35)
  Top 0.152: C16.1 1.68,50.9 1.68,53.34 R16.1 1.83,53.34 v4.27,55.78 | S1.4 1.83,58.06 5.79,58.06 S1.3 5.94,57.91 6.4,57.45 v6.86,57.45 | v19.2,45.11 20.88,43.43 30.18,43.43 33.98,39.62 41.91,39.62 U$1.99
  Bottom 0.152: v19.2,45.11 v6.86,57.45 5.18,55.78 v4.27,55.78
SVREF  (via drill 0.35)
  Top 0.152: 53.49,42.98 55.93,42.98 58.22,40.69 58.22,40.23 58.06,40.08 57.15,40.08 U$1.63 | 53.49,42.98 53.34,42.82 53.34,41.91 U$1.71 | v7.16,45.72 C14.1 | v12.04,40.84 13.41,39.47 R15.2 13.56,39.32 13.56,36.88 R14.1 | 53.49,42.98 53.19,43.28 v53.19,43.43
  Bottom 0.152: v7.16,45.72 v12.04,40.84 14.63,43.43 v53.19,43.43
U$1_EPHY_LINK_LED  (via drill 0.35)
  Top 0.152: v50.9,39.47 50.9,41.76 U$1.77 | v54.25,39.47 v52.88,38.1
  Bottom 0.152: v50.9,39.47 51.82,39.47 52.88,38.41 v52.88,38.1 | v54.25,39.47 54.25,49.53 57.45,52.73 57.45,54.25 55.93,55.78 J4.1
U$1_EPHY_RTX
  Top 0.152: U$1.94 44.2,41.91 44.2,49.84 40.69,53.34 J10.1
U$1_EPHY_RXN
  Top 0.152: U$1.89 46.18,41.91 46.18,48.16 50.75,52.73 50.75,53.34 J6.1
U$1_EPHY_RXP
  Top 0.152: U$1.90 45.72,41.91 45.72,48.16 48.16,50.6 48.16,53.34 J7.1
U$1_EPHY_SPD_LED
  Top 0.152: U$1.78 50.6,41.91 50.6,49.84 52.12,51.36 52.12,54.56 53.34,55.78 J5.1
U$1_EPHY_TXN  (1 unrouted)
U$1_EPHY_TXP
  Top 0.152: U$1.92 44.96,41.91 44.96,51.66 43.28,53.34 J9.1
U$1_HBIAS  (via drill 0.35)
  Top 0.152: v37.03,34.29 39.62,31.7 41.91,31.7 U$1.119
  Bottom 0.152: v37.03,34.29 29.72,34.29 28.35,35.66 26.52,35.66 25.45,36.73 J24.1
U$1_HPCOM  (via drill 0.35)
  Top 0.152: v40.39,28.65 41,29.26 41.91,29.26 U$1.125 | v29.41,21.34 28.5,20.42 26.52,20.42 25.45,21.49 J16.1
  Bottom 0.152: v40.39,28.65 40.39,28.04 33.68,21.34 v29.41,21.34
U$1_HPCOMFB  (via drill 0.35)
  Top 0.152: v32.77,29.72 41.91,29.72 U$1.124
  Bottom 0.152: v32.77,29.72 28.35,25.3 26.52,25.3 25.45,24.23 J15.1
U$1_HPOUTL  (via drill 0.35)
  Top 0.152: v44.2,32 43.13,30.94 42.06,30.94 U$1.121 | v38.41,27.89 24.99,27.89 24.23,28.65 24.23,30.63 25.3,31.7 J12.1
  Bottom 0.152: v44.2,32 43.59,32.61 42.98,32.61 38.41,28.04 v38.41,27.89
U$1_HPOUTR  (via drill 0.35)
  Top 0.152: v37.64,32.77 39.17,31.24 41.91,31.24 U$1.120
  Bottom 0.152: v37.64,32.77 37.64,34.59 34.14,38.1 24.99,38.1 24.23,37.34 24.23,35.36 25.3,34.29 J11.1
U$1_HPVCCBP
  Top 0.152: U$1.123 42.06,30.02 42.98,30.02 43.74,30.79 44.35,30.79 44.65,30.48 44.65,29.57 40.54,25.45 26.67,25.45 25.45,26.67 J14.1
U$1_HPVCCIN
  Top 0.152: J13.1 26.67,30.48 41.91,30.48 U$1.122
U$1_MCSI-CKN  (via drill 0.35)
  Top 0.152: v51.51,51.66 46.94,47.09 46.94,41.91 U$1.87
  Bottom 0.152: v51.51,51.66 53.19,53.34 J21.1
U$1_MCSI-CKP  (via drill 0.35)
  Top 0.152: v47.55,46.79 47.4,46.63 47.4,41.91 U$1.86
  Bottom 0.152: v47.55,46.79 47.55,49.07 46.48,50.14 46.48,50.75 46.79,51.05 53.49,51.05 55.78,53.34 J22.1
U$1_MCSI-D0N  (via drill 0.35)
  Top 0.152: v49.07,45.26 48.92,45.11 48.92,41.91 U$1.82
  Bottom 0.152: v49.07,45.26 48.16,45.26 46.18,47.24 46.18,50.9 47.4,52.12 48.77,52.12 49.53,52.88 49.53,53.8 50.44,54.71 51.36,54.71 51.97,55.32 51.97,56.39 51.21,57.15 49.53,57.15 J18.1
U$1_MCSI-D0P  (via drill 0.35)
  Top 0.152: v49.53,44.35 49.38,44.2 49.38,41.91 U$1.81
  Bottom 0.152: v49.53,44.35 48.62,44.35 45.87,47.09 45.87,51.82 47.09,53.03 47.09,53.95 47.85,54.71 49.68,54.71 50.75,55.78 J17.1
U$1_MCSI-D1N  (via drill 0.35)
  Top 0.152: v48.16,38.25 48.16,41.76 U$1.84 | v47.55,33.22 47.55,31.24 v47.7,31.09
  Bottom 0.152: v48.16,38.25 48.16,35.66 47.55,35.05 v47.55,33.22 | v47.7,31.09 47.7,30.18 46.79,29.26 46.79,28.04 47.24,27.58 53.03,27.58 60.35,34.9 60.35,53.19 55.78,57.76 45.11,57.76 43.28,55.93 J20.1
U$1_MCSI-D1P  (via drill 0.35)
  Top 0.152: v49.99,48.46 48.46,46.94 48.46,41.91 U$1.83
  Bottom 0.152: v49.99,48.46 52.73,48.46 57.15,52.88 57.15,53.8 56.24,54.71 55.32,54.71 54.56,55.47 54.56,56.39 53.49,57.45 47.24,57.45 45.72,55.93 J19.1
U$1_MICIN1N  (via drill 0.35)
  Top 0.152: v43.28,33.68 42.06,33.68 U$1.114 | v31.55,21.95 31.55,20.12 J27.1
  Bottom 0.152: v31.55,21.95 v43.28,33.68
U$1_MICIN1P  (via drill 0.35)
  Top 0.152: v39.32,34.29 39.47,34.14 41.91,34.14 U$1.113
  Bottom 0.152: v39.32,34.29 32.31,41.3 29.11,41.3 28.35,40.54 24.84,40.54 23.01,38.71 23.01,19.66 24.84,17.83 26.67,17.83 27.89,19.05 J28.1
U$1_PB0/UART2/TX
  Top 0.152: U$1.39 57.15,30.48 65.99,30.48 67.21,29.26 J66.1
U$1_PB1/UART2/RX
  Top 0.152: U$1.40 57.15,30.94 66.45,30.94 67.21,31.7 J67.1
U$1_PB2  (via drill 0.35)
  Top 0.152: v54.86,31.24 57,31.24 U$1.41 | v51.05,31.24 48.92,31.24 v48.46,31.7 | v61.72,20.42 66.9,15.24 67.82,15.24 68.58,16 68.58,32.61 67.36,33.83 67.36,34.29 J68.1
  Bottom 0.152: v51.05,31.24 v54.86,31.24 | v48.46,31.7 47.4,31.7 44.81,29.11 44.81,21.03 43.74,19.96 43.74,19.36 44.04,19.05 44.81,19.05 51.66,25.91 56.24,25.91 v61.72,20.42
U$1_PB3
  Top 0.152: U$1.42 57.15,31.7 62.33,31.7 67.36,36.73 J69.1
U$1_PB4/PWM0  (via drill 0.35)
  Top 0.152: v59.28,32.61 58.83,32.16 57.15,32.16 U$1.43
  Bottom 0.152: v59.28,32.61 59.74,32.61 66.45,39.32 67.21,39.32 J70.1
U$1_PB5/PWM1  (via drill 0.35)
  Top 0.152: v55.78,32.31 55.93,32.46 57,32.46 U$1.44 | v65.08,40.23 v59.44,40.23 | v71.63,34.29 71.63,20.73 69.95,19.05 J71.1
  Bottom 0.152: v55.78,32.31 55.78,36.58 v59.44,40.23 | v65.08,40.23 66.45,40.23 66.75,40.54 67.82,40.54 68.58,39.78 68.58,36.42 69.49,35.51 70.41,35.51 v71.63,34.29
U$1_PB6/I2C0/SCL  (via drill 0.35)
  Top 0.152: v54.86,32.92 57,32.92 U$1.45 | v49.53,37.34 v53.34,33.53 | v45.11,38.25 45.11,38.71 39.47,44.35 39.47,56.39 40.84,57.76 62.64,57.76 71.02,49.38 71.02,22.71 69.95,21.64 J72.1
  Bottom 0.152: v54.86,32.92 53.95,32.92 v53.34,33.53 | v49.53,37.34 49.53,37.8 48.46,38.86 47.09,38.86 46.48,38.25 v45.11,38.25
U$1_PB7/I2C0/SDA  (via drill 0.35)
  Top 0.152: v64.01,34.29 62.94,33.22 57.15,33.22 U$1.46
  Bottom 0.152: v64.01,34.29 65.53,34.29 66.9,32.92 67.82,32.92 68.58,32.16 68.58,31.24 69.34,30.48 70.26,30.48 71.32,29.41 71.32,25.6 J73.1
U$1_PB8/I2C1/SCL  (via drill 0.35)
  Top 0.152: v55.02,34.14 57,34.14 U$1.48 | v48.31,29.41 47.24,29.41 v45.87,28.04
  Bottom 0.152: v55.02,34.14 53.03,34.14 v48.31,29.41 | v45.87,28.04 47.4,26.52 65.68,26.52 66.75,25.45 68.58,25.45 69.8,26.67 J74.1
U$1_PB9/I2C1/SDA  (via drill 0.35)
  Top 0.152: v62.94,34.44 57.15,34.44 U$1.49
  Bottom 0.152: v62.94,34.44 66.9,30.48 68.58,30.48 J75.1
U$1_PC0/SPI1/MISO
  Top 0.152: U$1.52 57.15,35.66 64.47,35.66 66.9,38.1 67.82,38.1 68.58,37.34 68.58,33.07 69.8,31.85 J76.1
U$1_PC1/SPI1/SCK  (1 unrouted)
U$1_PC2/SPI1/CS
  Top 0.152: J78.1 68.58,38.1 68.58,39.78 67.82,40.54 66.75,40.54 62.64,36.42 57.15,36.42 U$1.54
U$1_PC3/SPI1/MOSI
  Top 0.152: U$1.55 57.15,36.88 62.64,36.88 66.6,40.84 68.43,40.84 69.8,39.47 J79.1
U$1_PE0/CSI-CLK-/LCD-CLK
  Top 0.152: U$1.37 57.15,29.72 64.16,29.72 67.21,26.67 J1.1
U$1_PE1/CSI-MCLK/LCD-DE
  Top 0.152: U$1.36 57.14,29.28 57.2,29.26 60.02,29.26 65.15,24.13 J29.1
U$1_PE2/CSI-HSYNC/LCD-HSYNC
  Top 0.152: U$1.35 57.15,28.96 59.89,28.96 67.21,21.64 J30.1
U$1_PE3/CSI-VSYNC/LCD-VSYNC
  Top 0.152: U$1.34 57.15,28.5 58.06,28.5 67.21,19.36 67.21,19.05 J31.1
U$1_PE4/CSI-D0/LCD-D2
  Top 0.152: U$1.33 57.15,28.04 57.15,27.13 67.21,17.07 67.21,16.61 J32.1
U$1_PE5/CSI-D1/-LCD-D3
  Top 0.152: U$1.32 55.78,26.67 55.78,20.88 63.55,13.11 63.55,11.43 64.77,10.21 J33.1
U$1_PE6/CSI-D2/LCD-D4
  Top 0.152: J34.1 60.96,11.43 60.96,13.11 55.32,18.75 55.32,26.67 U$1.31
U$1_PE7/CSI-D3/LCD-D5  (via drill 0.35)
  Top 0.152: v54.86,28.04 54.86,26.82 U$1.30
  Bottom 0.152: v54.86,28.04 70.26,28.04 71.02,27.28 71.02,26.06 70.26,25.3 69.34,25.3 68.58,24.54 68.58,23.62 67.82,22.86 66.29,22.86 63.4,19.96 63.4,12.19 62.64,11.43 60.96,11.43 J35.1
U$1_PE8/CSI-D4/LCD-D6
  Top 0.152: J36.1 57.15,10.67 58.37,11.89 58.37,14.02 54.1,18.29 54.1,26.67 U$1.28
U$1_PE9/CSI-D5/LCD-D7
  Top 0.152: J37.1 56.08,8.69 65.08,8.69 65.99,9.6 65.99,13.26 61.11,18.14 61.11,22.71 55.17,28.65 54.56,28.65 53.8,27.89 53.8,26.82 U$1.27
U$1_PE10/CSI-D6/LCD-D10  (via drill 0.35)
  Top 0.152: v52.58,24.54 52.58,26.67 U$1.24
  Bottom 0.152: v52.58,24.54 52.58,13.87 53.34,13.11 53.34,11.43 J38.1
U$1_PE11/CSI-D7/LCD-D11  (via drill 0.35)
  Top 0.152: v51.97,25.3 52.12,25.45 52.12,26.67 U$1.23
  Bottom 0.152: v51.97,25.3 49.99,23.32 49.84,23.32 48.31,21.79 48.31,11.43 49.53,10.21 J39.1
U$1_PE12/CSI-D8/LCD-D12  (via drill 0.35)
  Top 0.152: v45.26,30.94 46.63,30.94 47.09,30.48 49.07,30.48 51.66,27.89 51.66,26.82 U$1.22 | v32.77,17.07 32.77,15.09 36.42,11.43 39.78,11.43 40.69,10.52 40.69,9.6 41.3,8.99 45.87,8.99 46.94,10.06 J40.1
  Bottom 0.152: v45.26,30.94 45.26,30.48 32.77,17.98 v32.77,17.07
U$1_PE13/CSI-D9/LCD-D13  (via drill 0.35)
  Top 0.152: v50.14,22.71 50.14,26.67 U$1.18
  Bottom 0.152: v50.14,22.71 50.14,13.87 50.75,13.26 50.75,9.6 50.14,8.99 45.57,8.99 44.5,10.06 J41.1
U$1_PE14/CSI-D10/LCD-D14  (via drill 0.35)
  Top 0.152: v48.77,24.08 49.68,24.99 49.68,26.67 U$1.17 | v44.35,19.66 44.35,14.33 43.13,13.11 43.13,11.43 41.91,10.21 J47.1
  Bottom 0.152: v44.35,19.66 v48.77,24.08
U$1_PE15/CSI-D11/LCD-D15  (via drill 0.35)
  Top 0.152: v50.14,28.5 49.38,27.74 49.38,26.82 U$1.16 | v55.78,29.11 v53.19,29.11
  Bottom 0.152: v50.14,28.5 52.58,28.5 v53.19,29.11 | v55.78,29.11 56.69,29.11 63.09,35.51 67.82,35.51 68.58,34.75 68.58,33.83 69.49,32.92 70.41,32.92 71.63,31.7 71.63,17.83 65.23,11.43 64.31,11.43 63.4,10.52 63.4,9.6 62.48,8.69 40.84,8.69 J46.1
U$1_PE16/CSI-D12/LCD-D18  (1 unrouted)
U$1_PE17/CSI-D13/LCD-D19  (via drill 0.35)
  Top 0.152: v46.63,30.02 48.62,30.02 48.92,29.72 48.92,29.11 48.46,28.65 48.46,26.82 U$1.14 | v64.77,20.42 v58.06,27.13
  Bottom 0.152: v46.63,30.02 46.63,29.57 46.48,29.41 46.48,27.89 47.24,27.13 v58.06,27.13 | J44.1 v64.77,20.42
U$1_PE18/CSI-D14/LCD-D20  (via drill 0.35)
  Top 0.152: v48.62,25.3 48.16,25.76 48.16,26.67 U$1.13
  Bottom 0.152: v48.62,25.3 50.6,25.3 51.51,26.21 56.84,26.21 62.33,20.73 62.33,12.8 J43.1
U$1_PE19/CSI-D15/LCD-D21  (via drill 0.35)
  Top 0.152: v47.55,25.3 47.4,25.45 47.4,26.67 U$1.11 | v47.4,23.62 47.4,22.86 55.93,14.33 55.93,9.6 56.54,8.99 57.76,8.99 58.52,9.75 58.52,11.58 59.59,12.65 J42.1
  Bottom 0.152: v47.55,25.3 47.55,23.77 v47.4,23.62
U$1_PE20/CSI-FIELD/CSI-MIPI-M-CLK
  Top 0.152: J52.1 57.15,14.78 46.94,24.99 46.94,26.67 U$1.10
U$1_PE21/UART1/TX
  Top 0.152: U$1.9 46.48,26.67 46.48,23.32 54.56,15.24 54.56,12.8 J51.1
U$1_PE22/UART1/RX  (1 unrouted)
U$1_PE23/LCD-D22/
  Top 0.152: U$1.7 45.72,26.67 45.72,16.61 49.53,12.8 J49.1
U$1_PE24/LCD-D23  (via drill 0.35)
  Top 0.152: v45.57,28.96 45.26,28.65 45.26,26.82 U$1.6 | v46.33,22.55 46.33,17.68 50.75,13.26 50.75,12.19 49.99,11.43 48.31,11.43 47.09,12.65 J48.1
  Bottom 0.152: v45.57,28.96 45.57,28.65 45.26,28.35 45.26,23.62 v46.33,22.55
U$1_PF0/SDC0/D1  (via drill 0.35)
  Top 0.152: v33.68,36.42 41.91,36.42 U$1.107 | v31.85,36.42 28.35,32.92 24.84,32.92 23.93,32 23.93,26.06 v24.54,25.45
  Bottom 0.152: v31.85,36.42 v33.68,36.42 | v24.54,25.45 26.21,25.45 27.43,26.67 J59.1
U$1_PF1/SDC0/D0  (via drill 0.35)
  Top 0.152: v43.28,36.88 42.06,36.88 U$1.106
  Bottom 0.152: v43.28,36.88 43.28,36.27 37.34,30.33 29.11,30.33 28.04,29.26 J60.1
U$1_PF2/SDC0/CLK
  Top 0.152: U$1.105 41.91,37.34 33.68,37.34 28.04,31.7 J61.1
U$1_PF3/SDC0/CMD
  Top 0.152: U$1.103 41.91,38.1 31.85,38.1 28.04,34.29 J62.1
U$1_PF4/SDC0/D3  (1 unrouted)
U$1_PF5/SDC0/D2
  Top 0.152: U$1.101 41.91,38.86 28.5,38.86 28.04,39.32 J64.1
U$1_PF6  (via drill 0.35)
  Top 0.152: v43.28,38.86 42.82,39.32 42.06,39.32 U$1.100
  Bottom 0.152: v43.28,38.86 43.28,38.25 40.84,35.81 40.84,35.36 40.54,35.05 39.01,35.05 32.16,41.91 J65.1
U$1_PG0/SDC1/CLK
  Top 0.152: U$1.5 44.96,26.67 44.96,13.26 44.5,12.8 J53.1
U$1_PG1/SDC1/CMD  (via drill 0.35)
  Top 0.152: v44.2,28.04 44.5,27.74 44.5,26.82 U$1.4
  Bottom 0.152: v44.2,28.04 44.2,20.88 41.91,18.59 J54.1
U$1_PG2/SDC1/D0
  Top 0.152: U$1.3 44.2,26.67 44.2,20.42 39.47,15.7 39.47,12.8 J55.1
U$1_PG3/SDC1/D1
  Top 0.152: U$1.2 43.74,26.67 43.74,20.42 36.88,13.56 36.88,12.8 J56.1
U$1_PG4/SDC1/D2
  Top 0.152: J57.1 26.67,15.24 28.35,15.24 30.79,17.68 33.22,17.68 42.22,26.67 43.28,26.67 U$1.1
U$1_PG5/SDC1/D3  (via drill 0.35)
  Top 0.152: v39.47,28.04 41.91,28.04 U$1.128 | v33.98,22.55 31.24,22.55 30.02,21.34 30.02,19.36 28.5,17.83 26.67,17.83 25.45,19.05 J58.1
  Bottom 0.152: v33.98,22.55 v39.47,28.04
U$1_RTC-VIO
  Top 0.152: C15.2 3.5,48.16 9.3,48.16 10.82,46.63 22.25,46.63 25.15,43.74 38.71,43.74 41.91,40.54 U$1.97
U$1_SZQ  (via drill 0.35)
  Top 0.152: v8.99,50.75 7.32,50.75 R13.2 | v52.43,44.04 52.43,42.82 52.58,42.67 52.58,41.91 U$1.73
  Bottom 0.152: v8.99,50.75 12.65,50.75 19.66,43.74 52.12,43.74 v52.43,44.04
U$1_USB-DM  (via drill 0.35)
  Top 0.152: v43.28,35.36 42.06,35.36 U$1.110
  Bottom 0.152: v43.28,35.36 42.82,35.36 31.7,24.23 28.04,24.23 J2.1
U$1_USB-DP  (via drill 0.35)
  Top 0.152: v29.41,31.55 32.77,34.9 41.91,34.9 U$1.111
  Bottom 0.152: v29.41,31.55 28.35,30.48 27.43,30.48 26.67,29.72 26.67,28.8 25.76,27.89 24.84,27.89 23.93,26.98 23.93,23.93 24.99,22.86 26.67,22.86 J3.1
U$1_VCC-MCSI  (via drill 0.35)
  Top 0.152: v45.11,40.54 46.18,39.47 46.79,39.47 47.7,40.39 47.7,41.76 U$1.85 | v47.09,50.44 45.41,52.12 45.26,52.12 44.35,53.03 44.35,53.95 43.59,54.71 41.76,54.71 40.69,55.78 J23.1
  Bottom 0.152: v45.11,40.54 45.57,40.54 47.85,42.82 53.49,42.82 53.8,43.13 53.8,43.74 v47.09,50.44
U$1_VRA1  (via drill 0.35)
  Top 0.152: v38.41,34.29 38.41,33.53 39.47,32.46 41.91,32.46 U$1.117 | v32,40.69 26.67,40.69 25.45,41.91 J26.1
  Bottom 0.152: v32,40.69 v38.41,34.29
U$1_VRA2  (via drill 0.35)
  Top 0.152: v43.28,32 43.13,32.16 42.06,32.16 U$1.118
  Bottom 0.152: v43.28,32 43.28,30.48 33.22,20.42 24.84,20.42 23.32,21.95 23.32,37.34 25.3,39.32 J25.1

## Text on the board
tPlace: RESET | Tiger Lily v0.1 / www.zerogravityantfarm.com | GND | +5v
200bmp: C:/Users/mcfly/Downloads/tiger-lily-arum-lily-flower-flower-bouquet-png-clip-art-thumbnail.bmp